# Allegro board P1-Part_2.brd
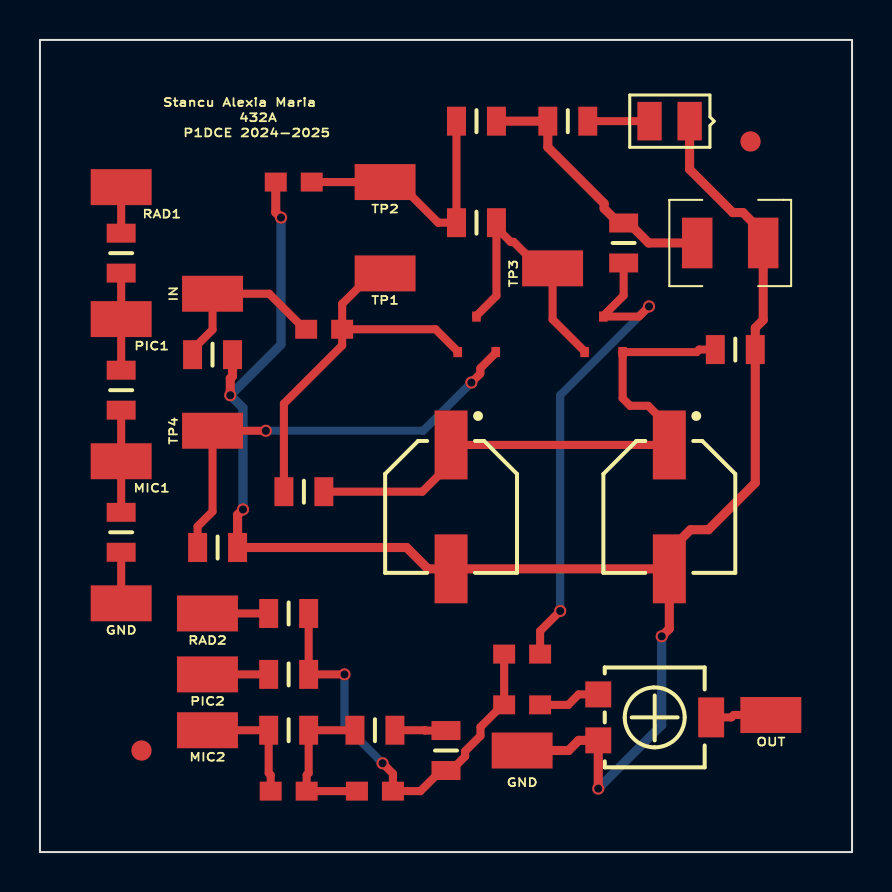
[diagram p0: board, top side]
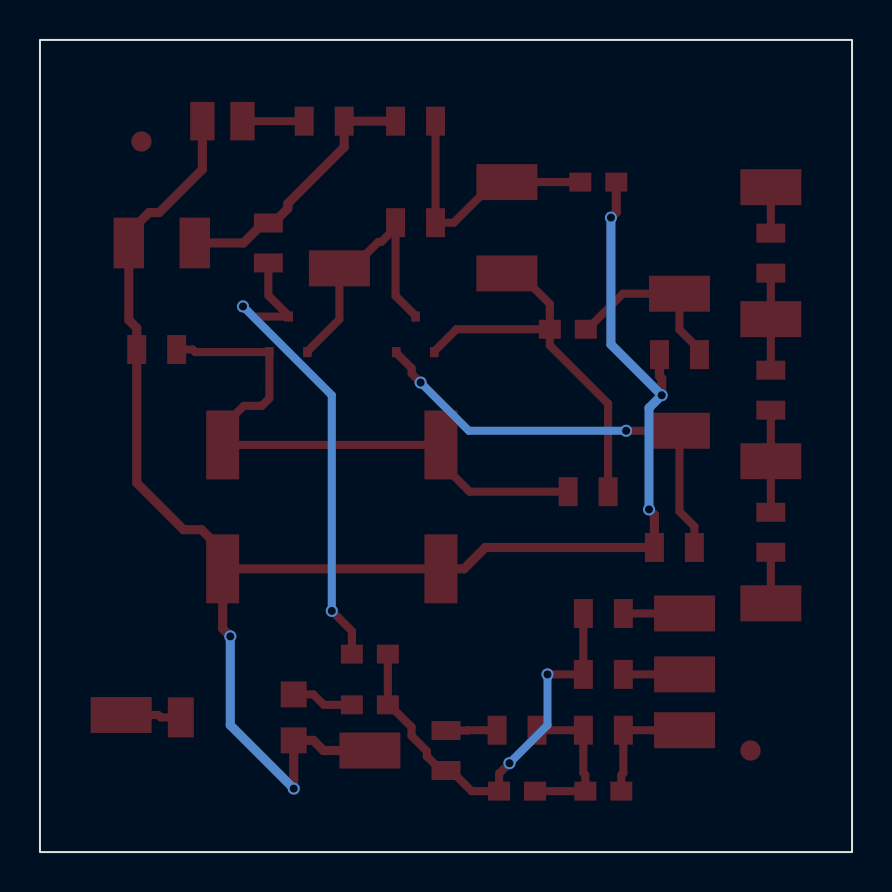
[diagram p1: board, bottom side, seen from below]

Outline 40.64 x 40.64 mm; copper layers: TOP, BOTTOM. Coordinates in mm from the lower left corner of the outline.
Outline path: rectangle 0,0 40.64,40.64

## Design rules (mm)
nets with their own width: min track width 0.406; nets N39345 N39443 N39521 N39531 N39549 N39621 N39665 N39689 N39721 N40085 N40799 N41253 N41803 N41810 N41825 N41838 N42596 N42630 N42971 N42975
nets with their own width: min track width 0.457; nets 0 VCC

## Placement (name value [footprint] x y rotation side)
C1  4.7u  [CAPC2008X126N_0805]  14.22 26.16 0 top
C2  4.7u  [CAPC2008X126N_0805]  24.13 9.91 180 top
C3  4.7u  [CAPC2008X126N_0805]  24.13 7.37 0 top
C4  10u  [CAPAE660X770N]  20.57 17.27 270 top
C5  10u  [CAPAE660X770N]  31.5 17.27 270 top
C6  1n  [CAPC2008X126N_0805]  12.45 3.05 0 top
C7  4.7n  [CAPC2008X126N_0805]  16.76 3.05 0 top
C8  4.7u  [CAPC2008X126N_0805]  12.7 33.53 0 top
D1  LED55B/TO  [SMD0805]  32.51 36.58 180 top
J1  IN  [SMD_PAD_3-05_1-80]  8.64 27.94 0 top
J2  RAD1  [SMD_PAD_3-05_1-80]  4.06 33.27 0 top
J3  PIC1  [SMD_PAD_3-05_1-80]  4.06 26.67 0 top
J4  MIC1  [SMD_PAD_3-05_1-80]  4.06 19.56 0 top
J5  CON  [SMD_PAD_3-05_1-80]  8.64 21.08 0 top
J6  RAD2  [SMD_PAD_3-05_1-80]  8.38 11.94 0 top
J7  PIC2  [SMD_PAD_3-05_1-80]  8.38 8.89 0 top
J8  OUT  [SMD_PAD_3-05_1-80]  36.58 6.86 0 top
J9  VCC  [1210RF_WV_12D]  34.54 30.48 0 top
J10  GND  [SMD_PAD_3-05_1-80]  24.13 5.08 0 top
J11  TP2  [SMD_PAD_3-05_1-80]  17.27 33.53 0 top
J12  TP3  [SMD_PAD_3-05_1-80]  25.65 29.21 0 top
J13  GND  [SMD_PAD_3-05_1-80]  4.06 12.45 0 top
J14  TP1  [SMD_PAD_3-05_1-80]  17.27 28.96 0 top
J15  MIC2  [SMD_PAD_3-05_1-80]  8.38 6.1 0 top
NOREF  Value  [unnamed]  5.08 5.08 0 top
NOREF#2  Value  [unnamed]  35.56 35.56 0 top
P1  50K  [TS53YL]  27.94 5.59 180 top
Q1  BC846B  [SOT23]  21.84 25.91 90 top
Q2  BC846B  [SOT23]  28.19 25.91 90 top
R1  47k  [RES2012X50N_0805]  8.64 24.89 180 top
R2  100k  [RES2012X50N_0805]  21.84 31.5 180 top
R3  1k  [RES2012X50N_0805]  8.89 15.24 180 top
R4  15k  [RES2012X50N_0805]  29.21 30.48 90 top
R5  1k  [RES2012X50N_0805]  34.8 25.15 180 top
R6  330k  [RES2012X50N_0805]  13.21 18.03 0 top
R7  100k  [RES2012X50N_0805]  12.45 11.94 0 top
R8  220k  [RES2012X50N_0805]  12.45 8.89 0 top
R9  68k  [RES2012X50N_0805]  12.45 6.1 0 top
R10  390k  [RES2012X50N_0805]  16.76 6.1 0 top
R11  1k  [RES2012X50N_0805]  26.42 36.58 180 top
R12  47k  [RES2012X50N_0805]  21.84 36.58 0 top
R13  2M  [RES2012X50N_0805]  4.06 29.97 90 top
R14  2M  [RES2012X50N_0805]  4.06 23.11 90 top
R15  47k  [RES2012X50N_0805]  4.06 16 90 top
R16  390k  [RES2012X50N_0805]  20.32 5.08 270 top

## Library data of the parts
C1-C3 C6-C8 = C
C4 C5 = C_elect_0
D1 = LED55B/TO_1
J1-J8 J10-J15 = CON1_0
J9 = CON2
P1 = POT
Q1 Q2 = BC846B_2
R1-R16 = R

## Footprints (pads in the part's own frame, mm; a bottom-side part is the same pattern mirrored in y, then rotated)
1210RF_WV_12D
  rect 1.524x2.54 smd: 1(-1.651,0) 2(1.651,0)
CAPAE660X770N
  rect 3.45x1.65 smd: 1(-3.1,0) 2(3.1,0)
CAPC2008X126N_0805
  rect 1.1x0.95 smd: 1(-0.9,0) 2(0.9,0)
RES2012X50N_0805
  rect 0.95x1.45 smd: 1(-1,0) 2(1,0)
SMD0805
  rect 1.219x1.93 smd: A(2.007,0) C(0,0)
SMD_PAD_3-05_1-80
  rect 3.05x1.8 smd: 1(0,0)
SOT23
  rect 0.508x0.432 smd: 1(-0.889,0.94) 2(-0.889,-0.965) 3(0.889,0)
TS53YL
  rect 1.3x1.3 smd: 1(0,0) 3(0,-2.3)
  rect 1.3x2 smd: 2(-5.65,-1.15)
unnamed
  round 1.016 smd: 1(0,0)

## Nets
VCC: J9.1 R4.2 R11.2 R12.2
0: C4.2(-) C5.2(-) C8.1 D1.C(CATHODE) J9.2 J10.1 P1.1 R1.1 R3.1 R5.1
N39345: C8.2 J11.1 R2.2 R12.1
N39443: C2.1 Q2.3 R4.1
N39521: C2.2 C3.1 C7.2 R7.2 R8.2 R16.2
N39531: C3.2 P1.3
N39549: J12.1 Q1.3 Q2.1 R2.1
N39621: C4.1 C5.1 Q2.2(E) R5.2 R6.2
N39665: C1.2 J14.1 Q1.1 R6.1
N39689: J5.1 Q1.2(E) R3.2
N39721: C1.1 J1.1 R1.2
N40085: C6.2 C7.1 R9.2 R10.1
N40799: D1.A R11.1
N41253: J8.1 P1.2(T)
N41803: J2.1 R13.2
N41810: J3.1 R13.1 R14.2
N41825: J4.1 R14.1 R15.2
N41838: J13.1 R15.1
N42596: R10.2 R16.1
N42630: C6.1 J15.1 R9.1
N42971: J7.1 R8.1
N42975: J6.1 R7.1

Pads without a net: NOREF 1; NOREF#2 1

## Via types
v1: diameter 0.61, hole 0.406, TOP to BOTTOM, 11 vias

## Routing (per net, layer and track width the routed paths; a pad name or vN(x,y) marks a point on that pad's centre or on a via; arc(x,y) is an arc through that point)
VCC: length 13.5
  TOP w0.457: R12.2 R11.2 25.42,35.27 28.23,32.46 28.23,32.21 28.96,31.48 R4.2 29.46,31.48 30.46,30.48 J9.1
0: length 89.6
  TOP w0.457: v1(9.53,22.86) 9.53,23.7 9.64,23.81 R1.1 ; C5.2 31.5,15.07 32.55,16.13 33.45,16.13 35.8,18.47 R5.1 35.8,26.23 36.2,26.62 J9.2 36.2,30.99 35.18,32 34.67,32 32.51,34.16 D1.C ; C5.2 31.5,11.18 v1(31.11,10.79) ; C5.2 C4.2 19.42,14.17 18.35,15.24 R3.1 9.89,16.87 v1(10.16,17.14) ; C8.1 11.8,32.01 v1(12.06,31.75) ; J10.1 26.45,5.08 26.96,5.59 P1.1 v1(27.94,3.17)
  BOTTOM w0.457: v1(12.06,31.75) 12.06,25.4 v1(9.53,22.86) 10.16,22.23 v1(10.16,17.14) ; v1(31.11,10.79) 31.11,6.35 v1(27.94,3.17)
N39345: length 13.2
  TOP w0.406: C8.2 J11.1 17.9,33.53 19.93,31.5 R2.2 R12.1
N39443: length 25.3
  TOP w0.406: v1(30.48,27.3) 29.97,26.8 Q2.3 28.19,26.84 29.21,27.85 R4.1 ; v1(26.04,12.06) 25.03,11.06 C2.1
  BOTTOM w0.406: v1(26.04,12.06) 26.04,22.86 v1(30.48,27.3)
N39521: length 22
  TOP w0.406: v1(15.24,8.89) R8.2 R7.2 ; v1(17.14,4.45) 17.66,3.93 C7.2 19.04,3.05 20.07,4.08 R16.2 20.57,4.08 21.28,4.79 21.28,5.05 22.05,5.82 22.05,6.26 23.15,7.37 C3.1 C2.2
  BOTTOM w0.406: v1(15.24,8.89) 15.24,6.35 v1(17.14,4.45)
N39531: length 3.1
  TOP w0.406: P1.3 26.96,7.89 26.44,7.37 C3.2
N39549: length 13.6
  TOP w0.406: R2.1 22.84,31.25 ; 22.84,31.25 23.55,30.54 23.7,30.54 25.03,29.21 J12.1 25.65,26.66 27.25,25.06 Q2.1 ; 22.84,31.25 22.84,27.84 21.84,26.84 Q1.3
N39621: length 29.6
  TOP w0.406: R5.2 32.99,25.15 32.87,25.02 Q2.2 29.16,22.71 29.54,22.33 30.44,22.33 31.5,21.27 C5.1 C4.1 20.57,19.47 19.14,18.03 R6.2
N39665: length 19.7
  TOP w0.406: C1.2 15.12,27.43 16.65,28.96 J14.1 ; C1.2 15.12,25.36 12.21,22.44 R6.1 ; C1.2 19.8,26.16 20.9,25.06 Q1.1
N39689: length 22.1
  TOP w0.406: R3.2 7.89,16.3 8.64,17.04 J5.1 v1(11.3,21.08) ; v1(21.59,23.5) 22.04,23.94 22.04,24.21 22.81,24.98 Q1.2
  BOTTOM w0.406: v1(21.59,23.5) 19.18,21.08 v1(11.3,21.08)
N39721: length 8.9
  TOP w0.406: C1.1 13.25,26.16 11.47,27.94 J1.1 8.64,26.14 7.64,25.14 R1.2
N40085: length 7.9
  TOP w0.406: C7.1 C6.2 13.35,3.85 13.45,3.95 R9.2 R10.1
N40799: length 3.1
  TOP w0.406: R11.1 D1.A
N41253: length 3
  TOP w0.406: P1.2 34.6,6.74 34.72,6.86 J8.1
N41803: length 2.3
  TOP w0.406: J2.1 R13.2
N41810: length 4.9
  TOP w0.406: R13.1 J3.1 R14.2
N41825: length 5.1
  TOP w0.406: R14.1 J4.1 R15.2
N41838: length 2.6
  TOP w0.406: R15.1 J13.1
N42596: length 2.6
  TOP w0.406: R10.2 19.25,6.1 19.26,6.08 R16.1
N42630: length 6.2
  TOP w0.406: C6.1 11.55,3.85 11.45,3.95 R9.1 J15.1
N42971: length 3.1
  TOP w0.406: R8.1 J7.1
N42975: length 3.1
  TOP w0.406: J6.1 R7.1

## Text on the board
Ref Des/Silkscreen Top: Stancu Alexia Maria | P1DCE 2024-2025 | 432A
XSECTION_CHART: *  SURFACE - AIR 0 MIL | L1 TOP CONDUCTOR - COPPER 7.2 MIL | *  DIELECTRIC - FR-4 48.6 MIL | L2 BOTTOM CONDUCTOR - COPPER 7.2 MIL | DESIGN CROSS SECTION CHART | ___________________________ | TOTAL THICKNESS 63 MIL | 1-2
DISPLAY_TOP: FIGURE | FINISHED_SIZE | 16.0 | DRILL CHART: TOP to BOTTOM | ALL UNITS ARE IN MILS | PLATED | QTY | 11
